# Altium PCB LM_HTR_001.PcbDoc
Units mm, origin at the board's own origin, x right, y up, seen from the top; angles counter-clockwise.
Board outline 41.61 x 70.1 mm, 4 copper layers (Top Layer, +5, +12, Bottom Layer), stack 0.778 mm thick; 15 components, 13 nets, 61 pads, 9 vias.
Unrouted connection lines stored in the file: 1.
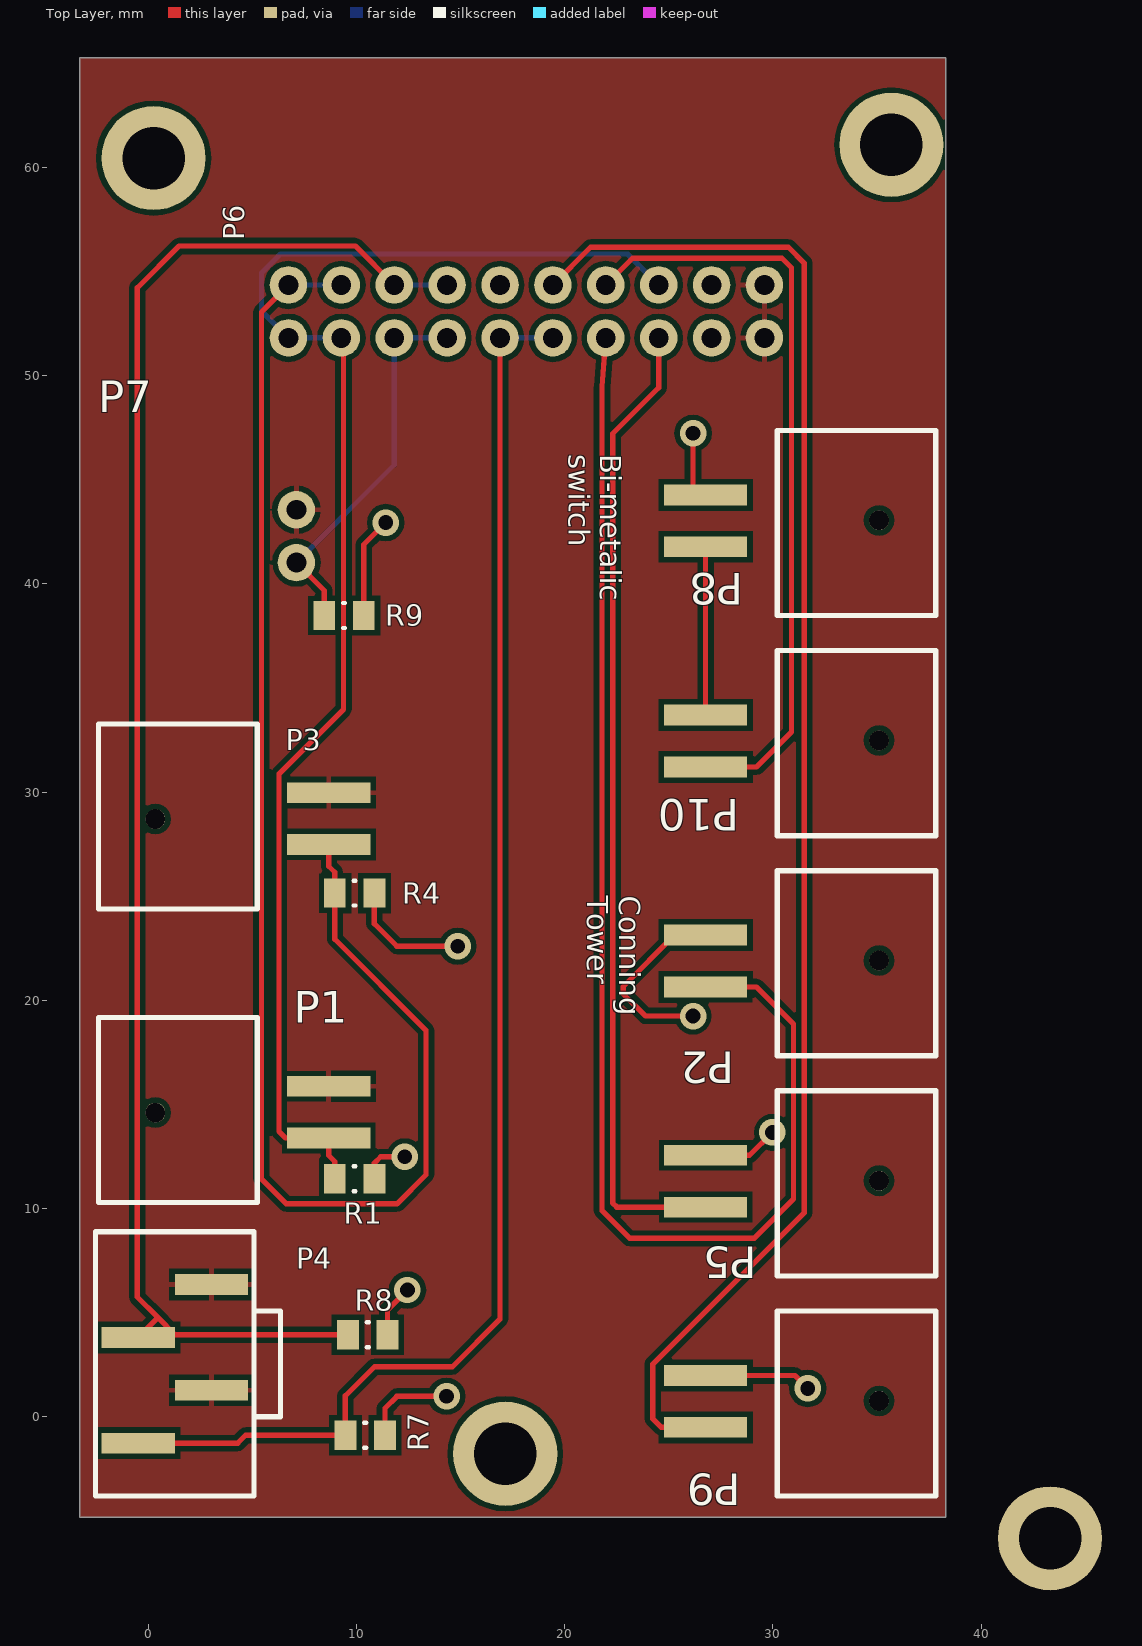
[diagram p0: Top Layer view]
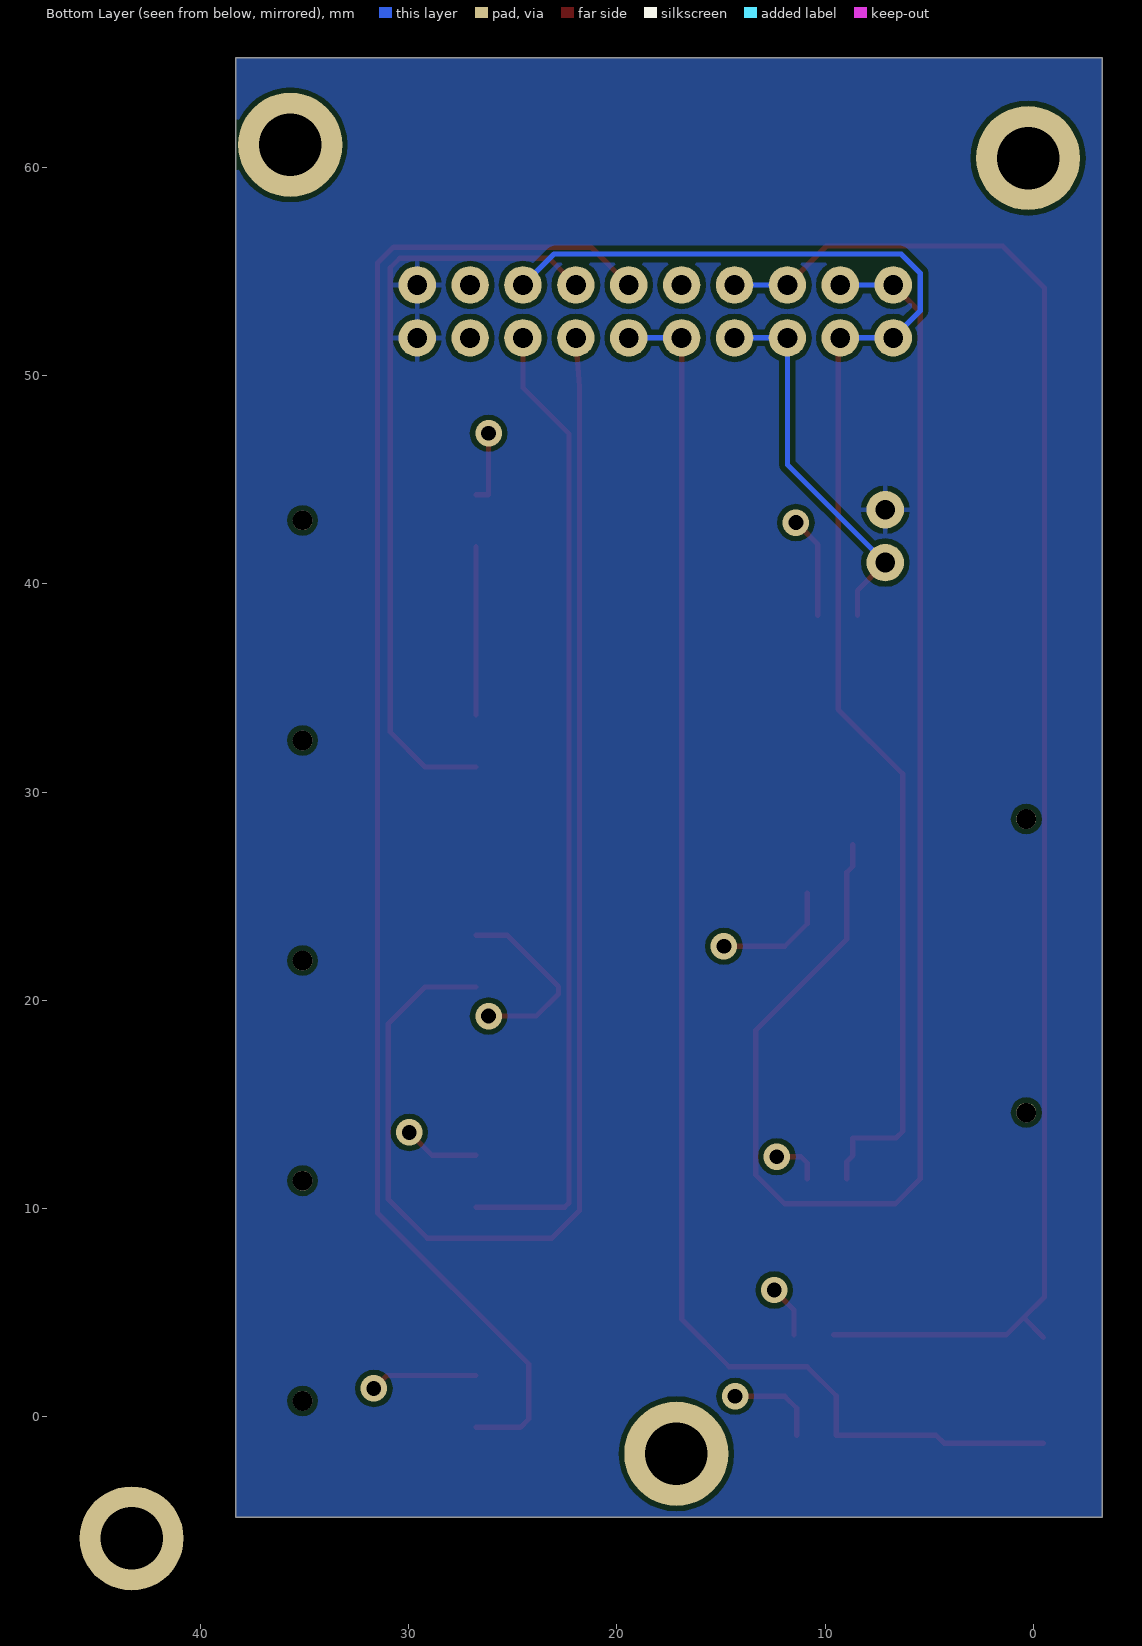
[diagram p1: Bottom Layer view, seen from below]
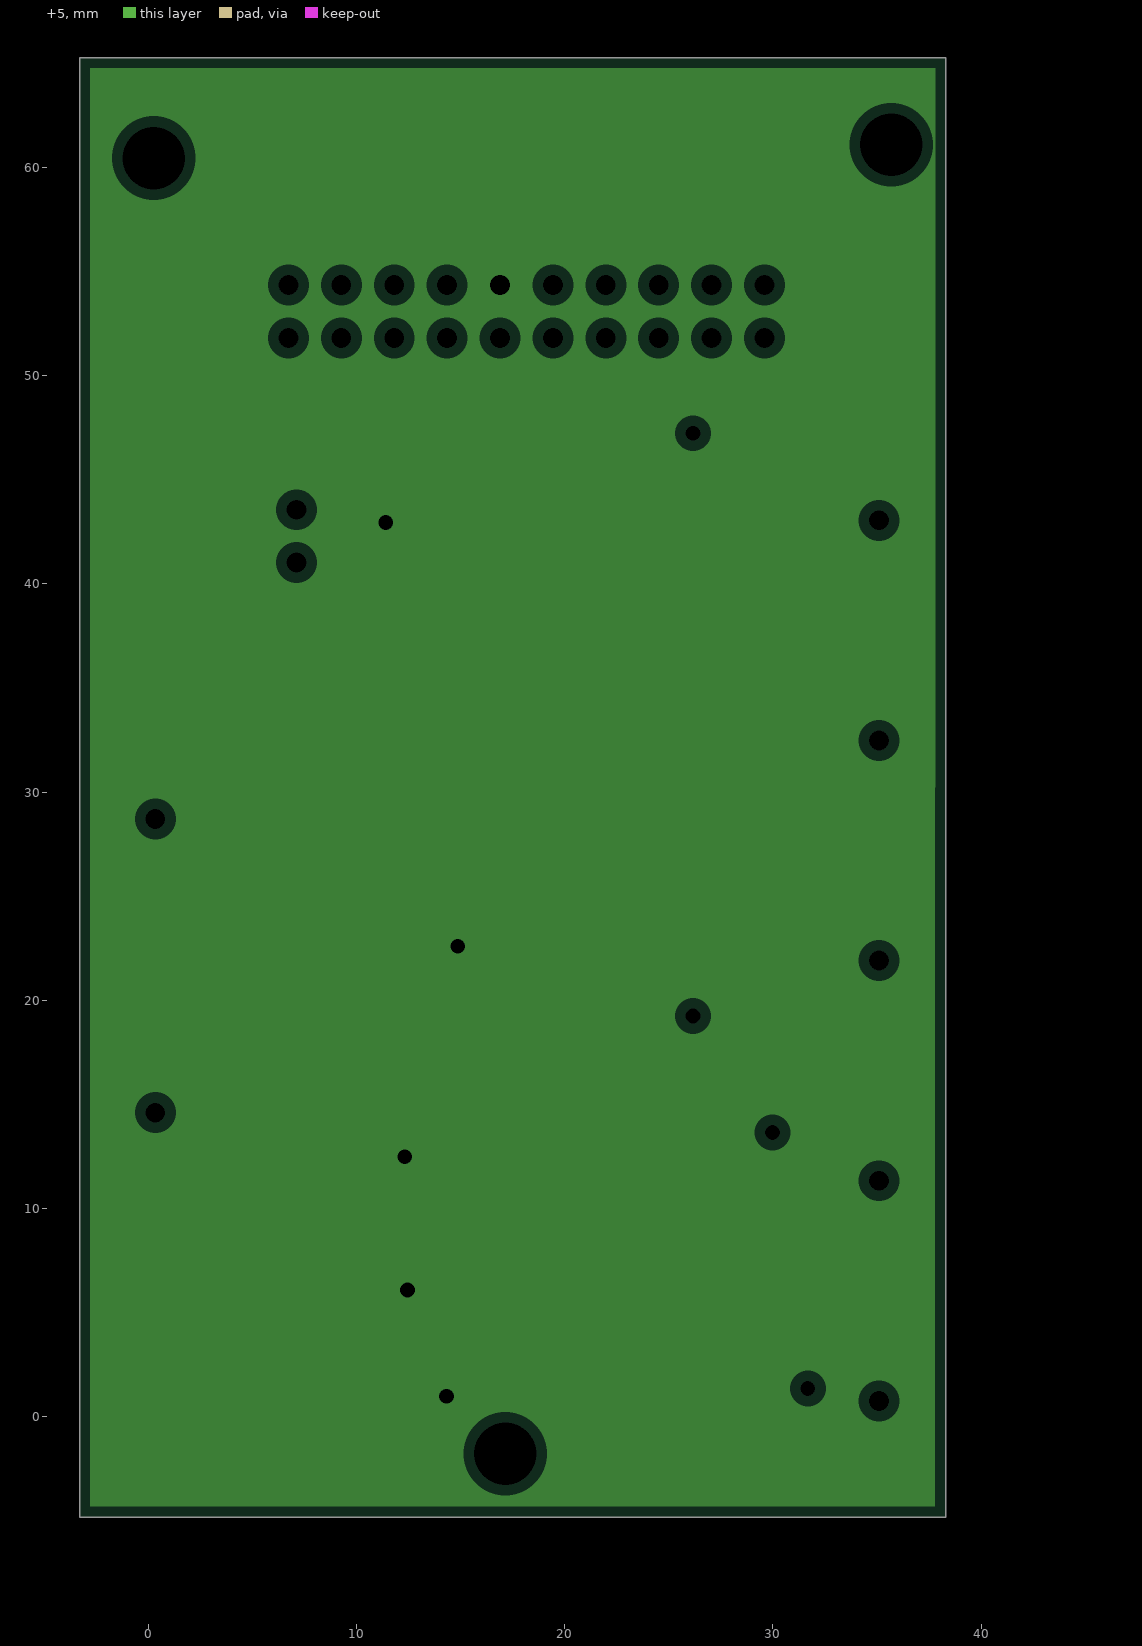
[diagram p2: +5, clearances drawn from the general rule]
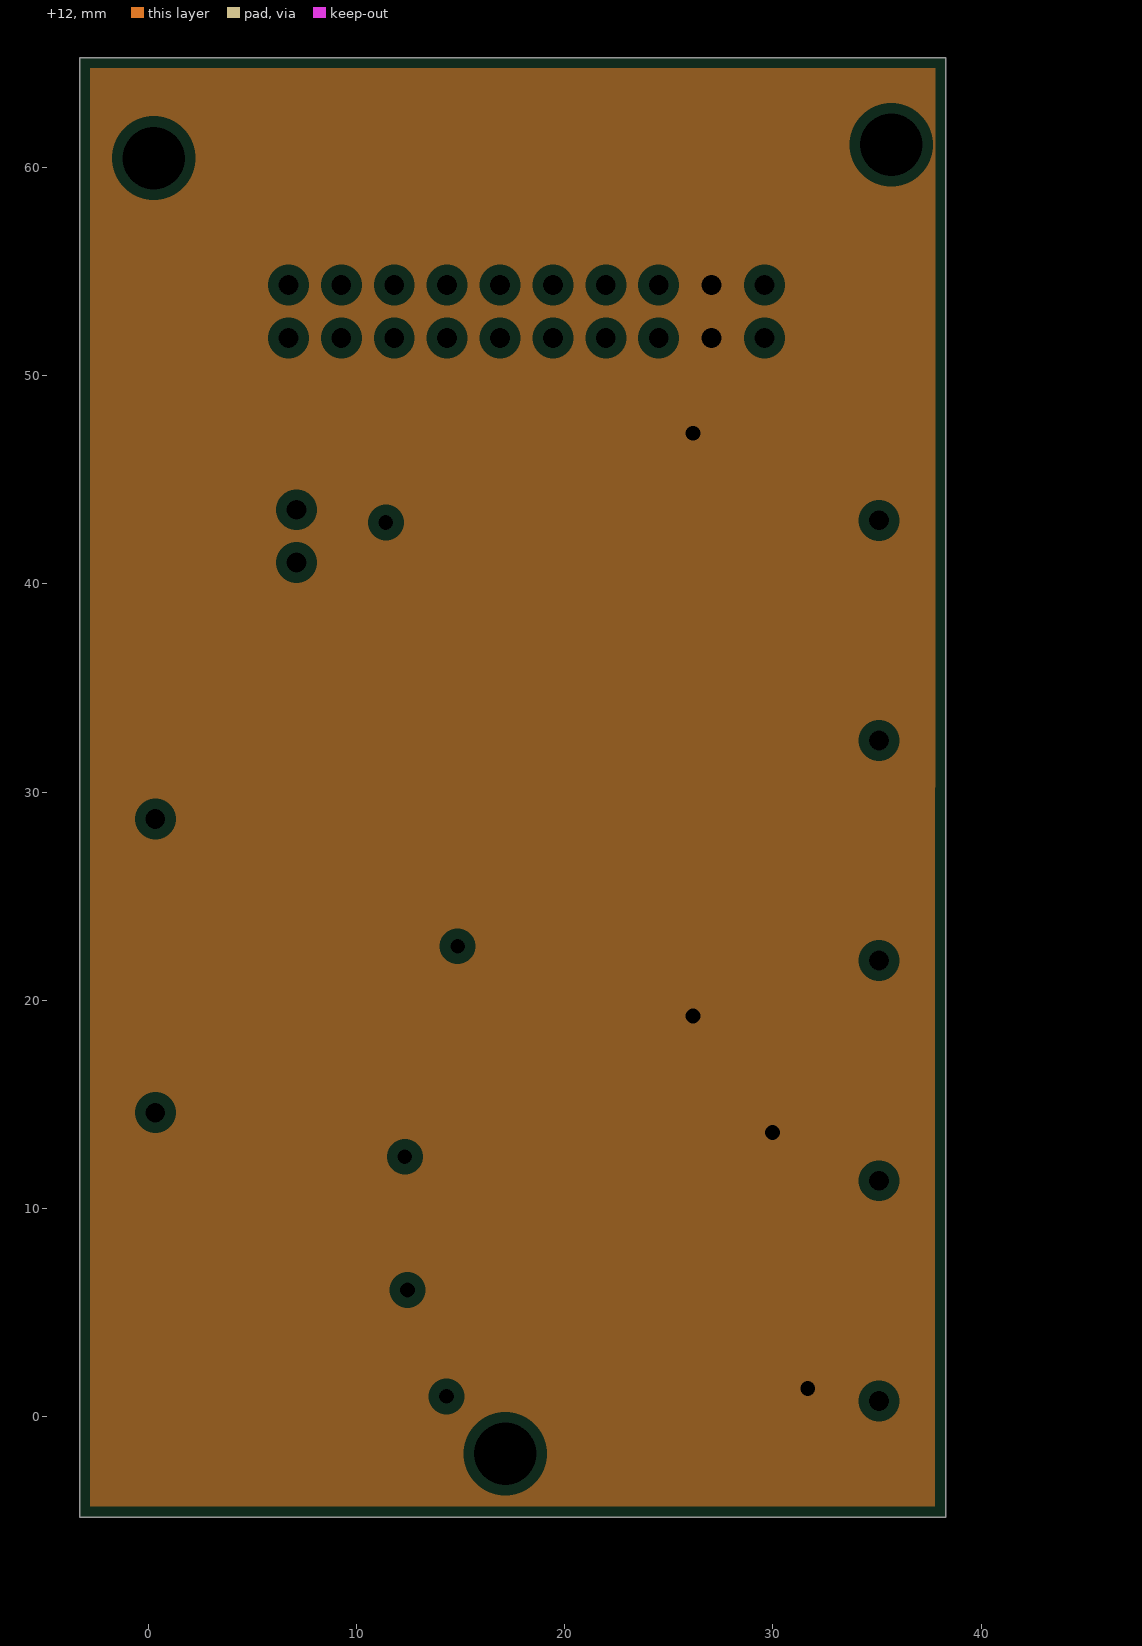
[diagram p3: +12, clearances drawn from the general rule]
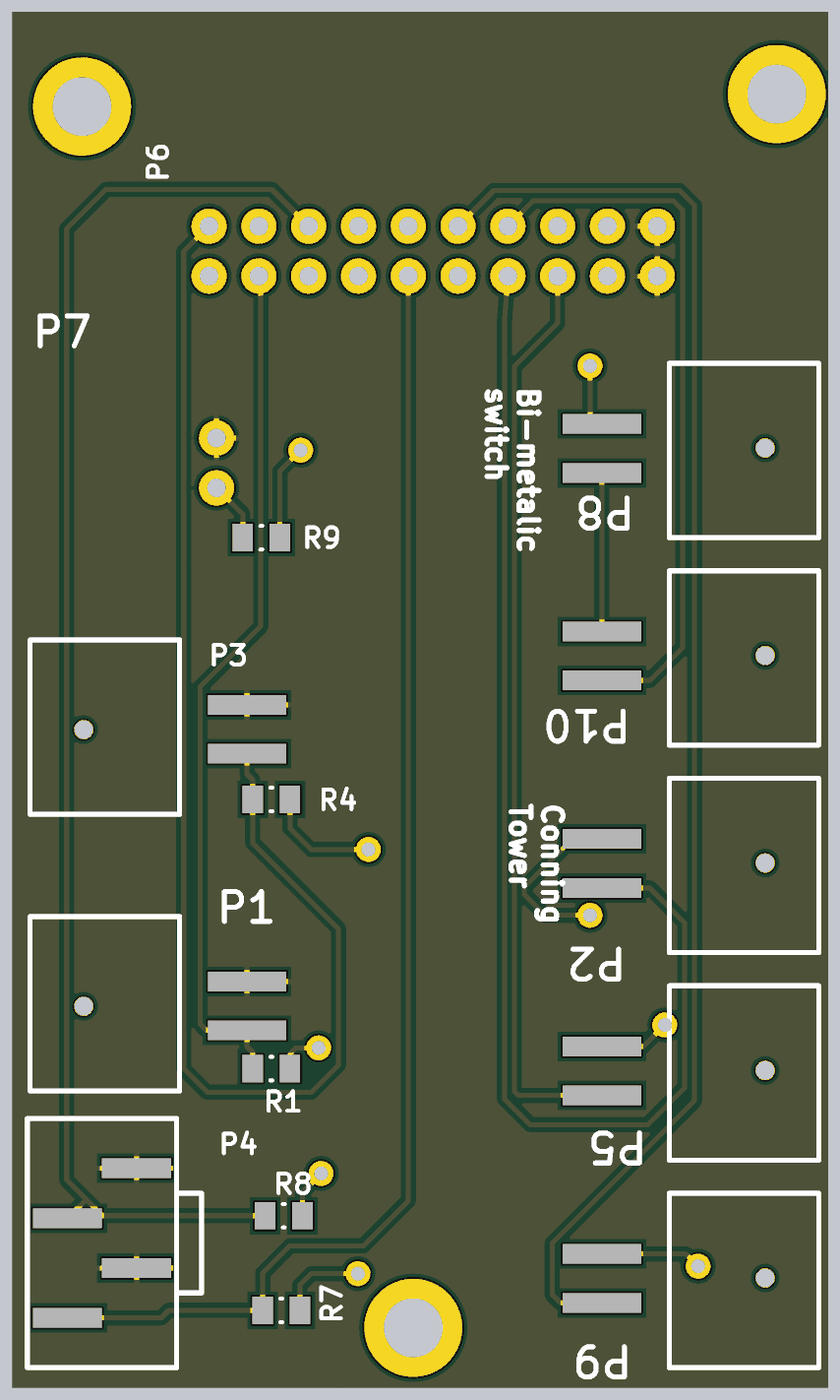
[diagram p4: 3D render of the assembled board from above, using the file's embedded part models]

## Layer stack, top to bottom
Top Solder: solder mask 0.0102, Solder Resist, Dk 3.5
Top Layer: signal copper 0.0356
Dielectric 1: core 0.254, FR-4, Dk 4.2
+5: plane copper 0.036, net +5
Dielectric 3: prepreg 0.127, Dk 4.2
+12: plane copper 0.036, net +12
Dielectric 2: core 0.254, Dk 4.2
Bottom Layer: signal copper 0.0356
Bottom Solder: solder mask 0.0102, Solder Resist, Dk 3.5

## Board outline
-3.302,-4.826 38.297,-4.826 38.305,65.278 -3.302,65.278

## Design rules (kind name [scope] priority, off if disabled: settings)
Clearance [All] p1: gap=0.254 ignorepadtopadclearanceinfootprint=FALSE except(0: Arc-Hole Track-Hole SMDPad-Hole THPad-Hole Via-Hole Fill-Hole Poly-Hole Region-Hole Text-Hole; 0.127: SMDPad-SMDPad)
ComponentClearance [All] p1: gap=0 collisioncheckmode=3 verticalgap=0.254 showdistances=TRUE
MinimumSolderMaskSliver [All] p1: minsoldermaskwidth=0.125
PlaneClearance [All] p1: clearance=0.508
PlaneConnect [All] p1: planeconnectstyle=Relief reliefexpansion=0.508 reliefentries=4 reliefconductorwidth=0.254 reliefairgap=0.254
PolygonConnect [All] p1: connectstyle=Relief reliefconductorwidth=0.254 reliefentries=4 polygonreliefangle="90 Angle" airgapwidth=0.254
RoutingVias [All] p1: holewidth=0.711 width=1.27 viastyle="Through Hole" minholewidth=0.711 minwidth=1.27 maxholewidth=0.711 maxwidth=1.27
SilkToSilkClearance [All] p1: silktosilkclearance=0.127
SilkToSolderMaskClearance [IsPad] p1: minsilkscreentomaskgap=0.127 clearancetoexposedcopper=TRUE
SolderMaskExpansion [All] p1: expansion=0.102
Width [All] p1: maxlimit=0.762 minlimit=0.254 preferedwidth=0.254
24 further rules are at their usual default settings.

## Components (designator, comment, footprint, x,y, rotation, side; value= is the part's Value field where it differs from the comment)
P1 "IPL1-102-03-L-SH-K" IPL1-102-03-L-SH-K 10.668,13.335 r90 top
P2 "IPL1-102-03-L-SH-K" IPL1-102-03-L-SH-K 24.765,23.177 r270 top
P3 "IPL1-102-03-L-SH-K" IPL1-102-03-L-SH-K 10.668,27.432 r90 top
P4 "IPL1-104-02-F-S-K" IPL1-104-02-F-S-K 1.27,-1.27 r90 top
P5 "IPL1-102-03-L-SH-K" IPL1-102-03-L-SH-K 24.765,12.605 r270 top
P6 "Header 10X2" IPL1-110-01-L-D-RE1-K 6.731,51.816 r0 top
P7 "IPL1-102-03-L-SH-K" IPL1-102-01-L-S-RE1-K 7.112,41.021 r90 top
P8 "IPL1-102-03-L-SH-K" IPL1-102-03-L-SH-K 24.765,44.323 r270 top
P9 "IPL1-102-03-L-SH-K" IPL1-102-03-L-SH-K 24.765,2.032 r270 top
P10 "IPL1-102-03-L-SH-K" IPL1-102-03-L-SH-K 24.765,33.75 r270 top
R1 "6K98 1% 0805(2012)" RESC0805(2012)_N 9.906,11.43 r0 top
R4 "6K98 1% 0805(2012)" RESC0805(2012)_N 9.906,25.146 r0 top
R7 "6K98 1% 0805(2012)" RESC0805(2012)_N 10.414,-0.889 r180 top
R8 "6K98 1% 0805(2012)" RESC0805(2012)_N 10.541,3.937 r0 top
R9 "6K98 1% 0805(2012)" RESC0805(2012)_N 9.398,38.481 r180 top

## Footprints (in the part's own frame and the unit in brackets; to place one, negate y for a bottom-side part, rotate by r counter-clockwise, add the part's x,y. Pads: shape width x height; smd on the part's side, far side on the other; paste and mask are expansions set on the pad)
IPL1-102-01-L-S-RE1-K [mm]
  round 1.8 hole 0.95: 1(0,0) 2(2.54,0)
  body extent -2.67,-0.25 6.48,9.78, height 7.95
IPL1-102-03-L-SH-K [mm]
  rect 1x4 smd: 1(0.048,2) 2(2.54,2)
  round 0.95 hole 0.95: 20(1.27,10.33)
  silkscreen extent -3.05,5.44 5.84,13.06, body extent -3.18,0.51 5.97,13.33, height 6.16
IPL1-104-02-F-S-K [mm]
  rect 1x3.52 smd: 1(0,1.76) 2(2.54,-1.76) 3(5.08,1.76) 4(7.62,-1.76)
  silkscreen extent -2.54,-5.08 10.16,3.81
IPL1-110-01-L-D-RE1-K [mm]
  round 1.8 hole 0.95: 1(0,0) 2(0,2.54) 3(2.54,0) 4(2.54,2.54) 5(5.08,0) 6(5.08,2.54) 7(7.62,0) 8(7.62,2.54) 9(10.16,0) 10(10.16,2.54) 11(12.7,0) 12(12.7,2.54) 13(15.24,0) 14(15.24,2.54) 15(17.78,0) 16(17.78,2.54) 17(20.32,0) 18(20.32,2.54) 19(22.86,0) 20(22.86,2.54)
  body extent -3.3,-0.25 26.16,11.94, height 9.14
RESC0805(2012)_N [mm] "Chip Resistor, Body 2.0x1.3mm, IPC Medium Density"
  rect 1.05x1.4 smd: 1(-0.95,0) 2(0.95,0)
  silkscreen extent -0.05,-0.6 0.05,0.6, body extent -1.1,-0.67 1.1,0.68, height 0.7

## Part data
P1 P2 P3 P5 P7 P8 P9 P10: Case/Package=SMD/SMT, Manufacturer=Samtec, ComponentLink1Description=http://www.samtec.com/documents/webfiles/pdf/ipl1.pdf, ComponentLink1URL=http://www.samtec.com/documents/webfiles/pdf/ipl1.pdf, Gender=Male, Manufacturer Part Number=IPL1-102-03-L-SH-K, Mount="Surface Mount", Number of Contacts=2, Orientation="Right Angle", Packaging=Bulk, Pitch=2.54mm, Radiation Hardening=No, Stock 1=0, Supplier 1=Avnet, Supplier Part Number 1=IPL1-102-03-L-SH-K, Termination=Solder
P4: library part IPL1-104-02-F-S
P6: "Header, 10-Pin, Dual row", LatestRevisionDate=17-Jul-2002, LatestRevisionNote="Re-released for DXP Platform.", Publisher="Altium Limited"
R1 R4 R7 R8 R9: library part CMP-1013-00606-1, "6K98 0.125W 1% 0805 (2012 Metric)  SMD", Manufacturer="Vishay Dale", Manufacturer Part Number=CRCW08056K98FKEA, Operating Temperature="-55°C ~ 155°C", Package / Case="0805 (2012 Metric)", Power (Watts)="0.125W, 1/8W", Resistance (Ohms)=6.98k, Supplier Device Package=0805, Supplier Part Number 1=541-6.98KCCT-ND, Temperature Coefficient=±100ppm/°C, Tolerance=±1%, Category=Resistors, ComponentLink1Description=http://www.vishay.com/docs/20035/dcrcwe3.pdf, ComponentLink1URL=http://www.vishay.com/docs/20035/dcrcwe3.pdf, Composition="Thick Film", Failure Rate=-, Features="Automotive AEC-Q200", Height - Seated (Max)="0.020\" (0.50mm)", Packaging="Cut Tape (CT)", Part Status=Active, Pricing 1="1=0.1, 10=0.044, 100=0.0178, 1000=0.00802, 2500=0.00696 (USD)", RoHS="RoHS Compliant", Size / Dimension="0.079\" L x 0.049\" W (2.00mm x 1.25mm)", Stock 1=34245, Supplier 1=Digi-Key

## Free pads (board coordinates)
  round 5 hole 3: 4(0.254,60.452) 4(17.145,-1.778) 4(35.687,61.087) 4(43.307,-5.842)

## Via types
v1: diameter 1.27, hole 0.711, Top Layer to Bottom Layer, 9 vias

## Nets (pads, with @x,y where several pads share a name; then routed paths per layer and width w, separated by ;. In a path a pad name is that pad's centre, name@x,y a point inside that pad or via, vN(x,y) a via of type N, cw(c..) or ccw(c..) an arc to the next point about the centre after c; other vN are vias at no path point)
+5: P6.10 R1.2 R4.2 R7.1 R8.2 R9.1 | length 20.2
  Top Layer w0.254: R9.1 10.348,41.885 v1(11.405,42.941) ; R1.2 10.856,12.182 11.161,12.487 v1(12.319,12.487) ; R4.2 10.856,23.678 11.938,22.596 v1(14.859,22.596) ; R7.1 11.364,0.407 11.938,0.981 v1(14.326,0.981) ; R8.2 11.491,5.131 v1(12.446,6.086)
+12: P2.1 P5.1 P6.17 P6.18 P8.1 P9.1 | length 21.5
  Top Layer w0.254: v1(26.162,19.243) 23.876,19.243 22.81,20.31 22.81,20.666 25.273,23.13 P2.1 ; v1(26.162,47.234) 26.162,44.275 P8.1 ; P9.1 31.051,1.984 v1(31.674,1.362) ; P5.1 28.874,12.557 v1(29.972,13.655)
"Arrestment Htr Out": P6.12 P9.2 | length 74.4
  Top Layer w0.254: P6.12 21.25,56.175 30.734,56.175 31.496,55.413 31.496,9.794 24.232,2.53 24.232,-0.102 24.638,-0.508 P9.2
"Arrestment Thermistor": P6.5 P6.7 P7.1 R9.2 | length 18.4
  Top Layer w0.254: P7.1 8.448,39.685 R9.2
  Bottom Layer w0.254: P7.1 11.811,45.72 P6.5 P6.7
"Bi-metalic switch": P8.2 P10.1 | length 8.1
  Top Layer w0.254: P10.1 P8.2
"Conning Tower Htr Out": P2.2 P6.13 | length 65.8
  Top Layer w0.254: P6.13 21.793,49.469 21.793,9.896 23.114,8.575 29.108,8.575 30.988,10.455 30.988,18.859 29.21,20.637 P2.2
"Conning Tower Thermistor": P1.1 P6.1 P6.3 P6.16 R1.1 | length 70.4
  Top Layer w0.254: R1.1 8.956,12.258 8.668,12.546 P1.1 6.597,13.383 6.274,13.706 6.274,30.876 9.373,33.975 9.373,51.816 P6.3
  Bottom Layer w0.254: P6.3 P6.1 5.436,53.111 5.436,54.93 6.35,55.845 23.022,55.845 P6.16
"Gearbox Htr Out": P5.2 P6.15 | length 47
  Top Layer w0.254: P6.15 24.511,49.418 22.301,47.209 22.301,10.268 22.504,10.065 P5.2
"Gearbox Thermistor": P3.1 P6.2 P6.4 R4.1 | length 72.8
  Top Layer w0.254: P6.2 5.436,53.061 5.436,11.42 6.629,10.226 11.938,10.226 13.335,11.623 13.335,18.557 8.956,22.936 R4.1 8.956,26.152 8.668,26.44 P3.1
  Bottom Layer w0.254: P6.2 P6.4
GND: P1.2 P3.2 P4.2 P4.4 P6.19 P6.20 P7.2
"Meter Thermistor 1": P4.3 P6.6 P6.8 R8.1 | length 77.2
  Top Layer w0.254: P4.3 0.461,4.761 ; R8.1 1.285,3.937 0.461,4.761 ; P6.6 9.941,56.226 1.473,56.226 -0.533,54.219 -0.533,5.756 0.461,4.761
  Bottom Layer w0.254: P6.6 P6.8
"Meter Thermistor 2": P4.1 P6.9 P6.11 R7.2 | length 70.6
  Top Layer w0.254: P4.1 4.293,-1.27 4.674,-0.889 R7.2 9.464,1.006 10.861,2.403 14.605,2.403 16.891,4.689 P6.9
  Bottom Layer w0.254: P6.9 P6.11
METER_HTR_OUT: P6.14 P10.2 | length 36.8
  Top Layer w0.254: P6.14 23.256,55.641 30.429,55.641 30.886,55.184 30.886,32.887 29.21,31.21 P10.2
pads on no net: P1.20 P2.20 P3.20 P5.20 P8.20 P9.20 P10.20

## Polygon pours and split planes (outlines as drawn)
GND on Bottom Layer "Bottom_GND" (solid, pour order 0): -3.302,-4.826 38.297,-4.826 38.297,65.278 -3.302,65.278
GND on Top Layer "Top_GND" (solid, pour order 1): -3.302,65.278 38.297,65.278 38.297,-4.826 -3.302,-4.826
+5 on +5 (split plane): 37.787,-4.316 -2.792,-4.316 -2.792,64.768 37.794,64.768
+12 on +12 (split plane): 37.787,-4.316 -2.792,-4.316 -2.792,64.768 37.794,64.768

## Silkscreen, mask and mechanical layers (free items; w line width, h text height)
Top Overlay:
  text "Bi-metalic  / switch" at 20.193,46.228 h1.02 r270
  text "Conning / Tower" at 21.082,25.019 h1.02 r270

## Dimensions
-3.302,-4.826 to -3.302,65.278 on Mechanical 1
17.145,-1.778 to 0.254,60.452 on Mechanical 1
43.307,-5.842 to 35.687,61.087 on Mechanical 1
35.687,61.087 to 0.254,60.452 on Mechanical 1
38.354,-4.826 to -3.302,-4.826 on Mechanical 1